# Altium PCB ECG.PcbDoc
Units mil, origin at the board's own origin, x right, y up, seen from the top; angles counter-clockwise.
Board outline 3300 x 2120 mil, 2 copper layers (Top Layer, Bottom Layer), stack 60.4 mil thick; 64 components, 52 nets, 215 pads, 92 vias.
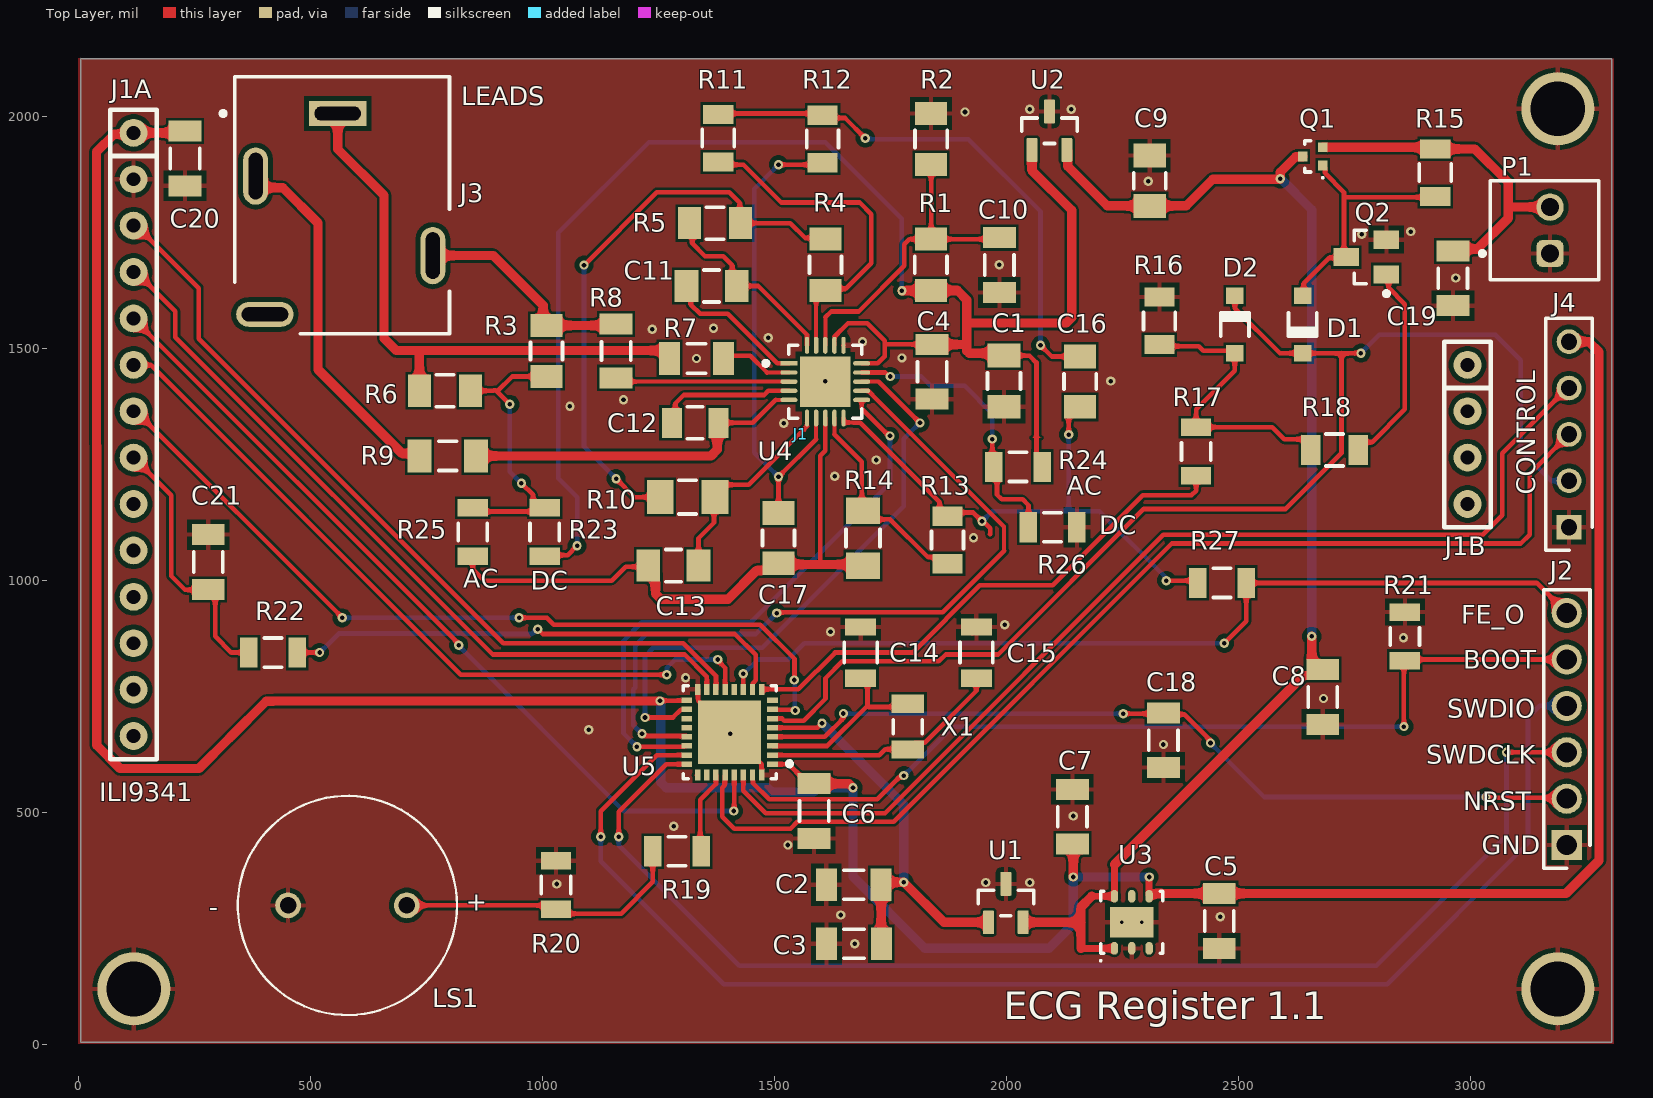
[diagram p0: Top Layer view]
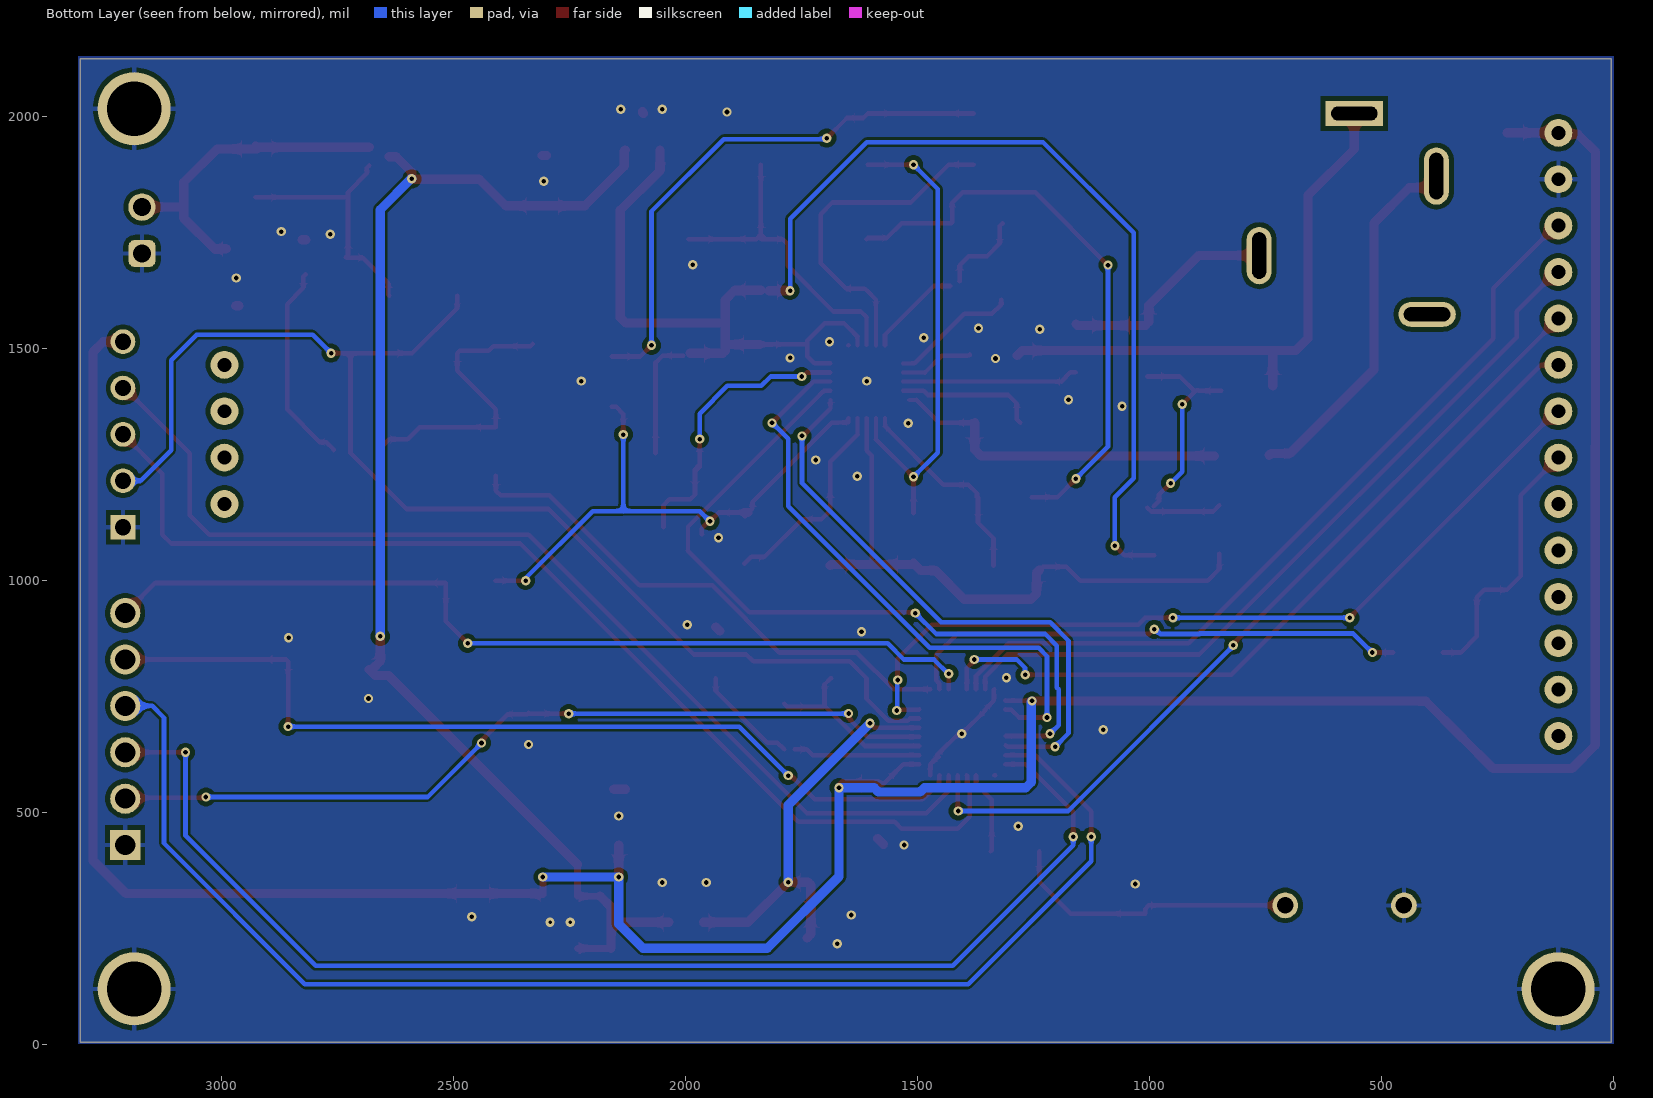
[diagram p1: Bottom Layer view, seen from below]
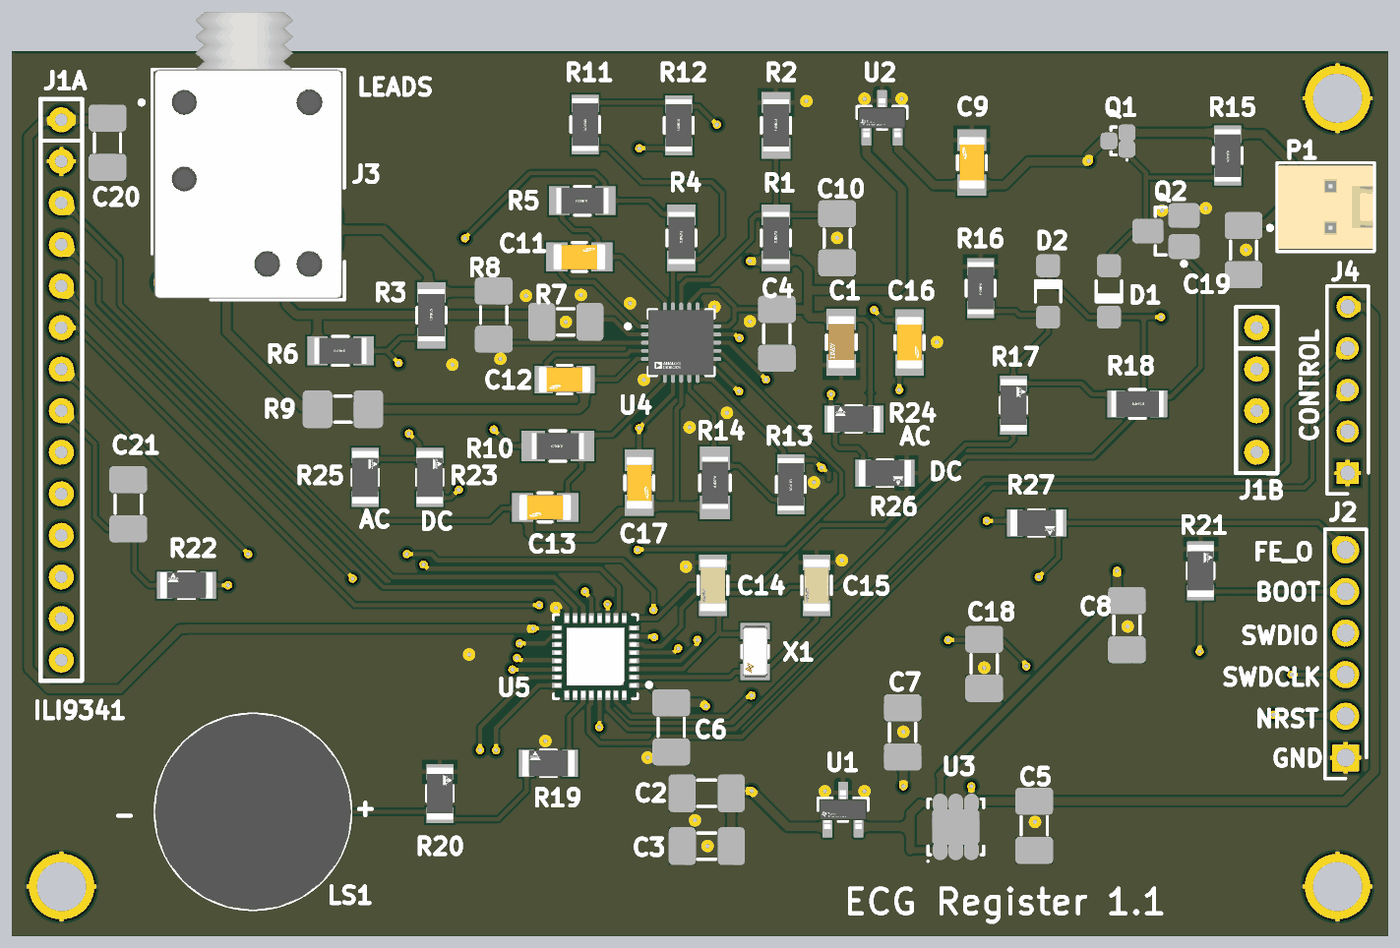
[diagram p2: 3D render of the assembled board from above, using the file's embedded part models]

## Layer stack, top to bottom
Top Solder: solder mask 0.5, Solder Resist, Dk 3.3
Top Layer: signal copper 0.7
Dielectric1: core 59, FR-4, Dk 4.3
Bottom Layer: signal copper 0.7
Bottom Solder: solder mask 0.5, Solder Resist, Dk 3.3

## Board outline
5,5 5,2125 3305,2125 3305,5

## Design rules (kind name [scope] priority, off if disabled: settings)
Clearance [All] p1: gap=5 ignorepadtopadclearanceinfootprint=TRUE except(10: Arc-THPad Track-THPad SMDPad-THPad THPad-THPad THPad-Via THPad-Fill THPad-Poly THPad-Region THPad-Text THPad-Hole Via-Via Via-Fill Via-Poly Via-Region Via-Text Via-Hole Fill-Text Fill-Hole Poly-Text Poly-Hole Region-Text Region-Hole Text-Text Text-Hole)
ComponentClearance [All] p1: gap=10 collisioncheckmode=3 verticalgap=10 showdistances=FALSE donotcheckwithout3dbody=TRUE
DiffPairsRouting [All] p1: maxlimit=10 minlimit=10 mostfreqgap=10 toplayer_minwidth=10 toplayer_maxwidth=10 toplayer_prefwidth=10 bottomlayer_minwidth=10 bottomlayer_maxwidth=10 bottomlayer_prefwidth=10 maxuncoupledlength=500
HoleSize [All] p1: absolutevalues=TRUE maxlimit=300 minlimit=10 maxpercent=80.000 minpercent=20.000
MinimumAnnularRing [All] p1: minimumring=5
MinimumSolderMaskSliver [All] p1: minsoldermaskwidth=5
PasteMaskExpansion [All] p1: expansion=10
PlaneClearance [All] p1: clearance=15
PlaneConnect [All] p1: pad.planeconnectstyle=Relief pad.reliefexpansion=20 pad.reliefentries=4 pad.reliefconductorwidth=10 pad.reliefairgap=10 via.planeconnectstyle=Direct via.reliefexpansion=20 via.reliefentries=4 via.reliefconductorwidth=10 via.reliefairgap=10
PolygonConnect [All] p1: thpad.connectstyle=Relief thpad.reliefconductorwidth=10 thpad.reliefentries=4 thpad.polygonreliefangle="90 Angle" thpad.airgapwidth=10 smdpad.connectstyle=Relief smdpad.reliefconductorwidth=10 smdpad.reliefentries=4 smdpad.polygonreliefangle="90 Angle" smdpad.airgapwidth=10 via.connectstyle=Direct via.reliefconductorwidth=10 via.reliefentries=4 via.polygonreliefangle="90 Angle" via.airgapwidth=10
RoomDefinition ECG [InComponentClass('ECG')] p1: confinementstyle=ConfineOut formatcopy=TRUE lockcomponents=FALSE outline -877,746.05 -131,746.05 -131,1422.05 -877,1422.05
RoutingVias RoutingVias_GND [(InNet('GND'))] p1: holewidth=4 width=8 viastyle="Through Hole" minholewidth=4 minwidth=8 maxholewidth=10 maxwidth=20
RoutingVias RoutingVias_P1 [(InComponent('P1'))] p2: holewidth=28 width=50 viastyle="Through Hole" minholewidth=5 minwidth=10 maxholewidth=28 maxwidth=50
RoutingVias [All] p3: holewidth=10 width=20 viastyle="Through Hole" minholewidth=5 minwidth=10 maxholewidth=10 maxwidth=20
SMDNeckDown [All] p1: percent=150.000
SilkToSolderMaskClearance SilkscreenOverComponentPads [IsPad] p1: minsilkscreentomaskgap=5 clearancetoexposedcopper=TRUE
SolderMaskExpansion [All] p1: expansion=5 istentingtop=FALSE
SupplyNets "Schematic Supply Nets_5" [InNet('GND')] p1: voltage=0.000
SupplyNets "Schematic Supply Nets_4" [InNet('V5V')] p2: voltage=0.000
SupplyNets "Schematic Supply Nets_3" [InNet('VCC')] p3: voltage=0.000
SupplyNets "Schematic Supply Nets_2" [InNet('VDDA')] p4: voltage=0.000
SupplyNets "Schematic Supply Nets_1" [InNet('VAD')] p5: voltage=0.000
SupplyNets "Schematic Supply Nets" [InNet('VBAT')] p6: voltage=0.000
Width [All] p1: maxlimit=20 minlimit=9 preferedwidth=20 toplayer_prefwidth=10 bottomlayer_minwidth=10 minimp=50.000000 maximp=50.000000 favimp=50.000000 checkconnectedcopper=TRUE
22 further rules are at their usual default settings.

## Components (designator, comment, footprint, x,y, rotation, side; value= is the part's Value field where it differs from the comment)
C1 "10u" FP-1206-L_3_2_0_2-W_1_6_0-IPC_B 1995,1430 r270 top
C2 "4.7u" CAPC1206(3216)190_N 1671.15,344.57 r0 top value=4.7uF
C3 "100n" CAPC1206(3216)100_N 1671.53,217.37 r0 top value=100nF
C4 "100n" CAPC1206(3216)100_N 1840,1450 r90 top value=100nF
C5 "4.7u" CAPC1206(3216)190_N 2459.06,266.58 r90 top value=4.7uF
C6 "100n" CAPC1206(3216)100_N 1585.86,503.23 r90 top value=100nF
C7 "100n" CAPC1206(3216)100_N 2142.48,491.13 r270 top value=100nF
C8 "100n" CAPC1206(3216)100_N 2681.97,749.31 r90 top value=100nF
C9 "1u" FP-CL31-IPC_B 2309.06,1861.89 r90 top
C10 "100n" CAPC1206(3216)100_N 1985,1680 r90 top value=100nF
C11 "220n" FP-CL31-IPC_B 1365,1635 r0 top
C12 "1n" FP-CL31-IPC_C 1329.46,1339.93 r180 top
C13 "220n" FP-CL31-IPC_B 1282.52,1032.42 r180 top
C14 "4.3p" FP-C1206C-EB-MFG 1686.22,845 r90 top value="4.3 pF"
C15 "4.3p" FP-C1206C-EB-MFG 1935.5,845.01 r90 top value="4.3 pF"
C16 "10n" FP-CL31-IPC_B 2159.06,1428.86 r270 top
C17 "22n" FP-CL31-IPC_B 1509.06,1091.52 r270 top
C18 "100n" CAPC1206(3216)100_N 2338.71,656.08 r270 top value=100nF
C19 "100n" CAPC1206(3216)100_N 2962.58,1651.53 r90 top value=100nF
C20 "100n" CAPC1206(3216)100_N 230,1910 r270 top value=100nF
C21 "100n" CAPC1206(3216)100_N 280,1040 r270 top value=100nF
D1 "1N4148" DIOD-SOD123-2_V 2638.66,1552.18 r270 top
D2 "1N4148" DIOD-SOD123-2_V 2492.43,1552.18 r90 top
J1 "ILI9341_Shield" ILI9341_Shield-Footprint-1 118.54,664.73 r0 top
J2 "90147-1106" RHDR6W64P0X254_1X6_1509X244X870P 3207.98,430 r90 top
J3 "35RAPC3BH3" FP-35RAPC3BH3-MFG 568.56,1879.28 r270 top
J4 "90147-1105" RHDR5W70P0X254_1X5_1255X244X870P 3212.8,1115.12 r90 top
LS1 "CMT-1285C-015" CUI_CMT-1285C-015 580,300 r180 top
P1 "61900211121" 61900211121 3160,1755 r270 top
Q1 "NTE4151PT1G" ONSC-SC-89-3-463C-02_V 2660.31,1914.24 r180 top
Q2 "BSS123" FAIR-SOT23-3_V 2775.81,1697.32 r90 top
R1 "10M" FP-KTR18-IPC_B 1837.55,1680.72 r270 top
R2 "10M" FP-KTR18-IPC_B 1837.98,1951.61 r270 top
R3 "10M" FP-KTR18-IPC_B 1009.05,1494.9 r270 top
R4 "10M" FP-KTR18-IPC_B 1610.31,1680.72 r270 top
R5 "10M" FP-KTR18-IPC_B 1372.25,1770.45 r0 top
R6 "10M" FP-KTR18-IPC_B 790.31,1409.17 r0 top
R7 "180k" RESC3216X70X40NL20T20 1332.42,1478.75 r0 top
R8 "180k" RESC3216X70X40NL20T20 1159.06,1495.23 r270 top
R9 "360k" RESC3216X60X45ML10T20 796.21,1268.79 r0 top
R10 "1.5M" FP-KTR18-IPC_A 1313.14,1180 r0 top
R11 "1M" FP-KTR18-IPC_C 1379.07,1953.49 r90 top
R12 "1M" FP-KTR18-IPC_C 1604.07,1951.61 r270 top
R13 "1M" FP-KTR18-IPC_C 1873.41,1087.59 r90 top
R14 "100k" FP-KTR18-IPC_A 1691.22,1091.52 r270 top
R15 "1M" FP-KTR18-IPC_C 2924.47,1879.12 r90 top
R16 "1M" FP-KTR18-IPC_C 2330,1560 r90 top
R17 "10k" FP-CRCW1206-e3-IPC_C 2409.06,1278.54 r90 top
R18 "1M" FP-KTR18-IPC_C 2707.24,1281.5 r180 top
R19 "10k" FP-CRCW1206-e3-IPC_C 1290.34,416.68 r180 top
R20 "10k" FP-CRCW1206-e3-IPC_C 1029.45,343.95 r90 top
R21 "10k" FP-CRCW1206-e3-IPC_C 2859.06,880 r90 top
R22 "10k" FP-CRCW1206-e3-IPC_C 420,845 r180 top
R23 "10k" FP-CRCW1206-e3-IPC_C 1005,1105 r90 top
R24 "10k" FP-CRCW1206-e3-IPC_C 2025,1245 r180 top
R25 "10k" FP-CRCW1206-e3-IPC_C 850,1105 r90 top
R26 "10k" FP-CRCW1206-e3-IPC_C 2100,1115 r0 top
R27 "10k" FP-CRCW1206-e3-IPC_C 2465,995 r0 top
U1 "TLV76033DBZT" FP-DBZ0003A-MFG 1999.06,304.96 r90 top
U2 "TLV76033DBZT" FP-DBZ0003A-MFG 2092.98,1969.65 r90 top
U3 "LD39050PU33R" DFN6D_L 2270.44,263.63 r90 top
U4 "AD8232ACPZ-WP" FP-CP-20-8-IPC_A 1609.9,1428.86 r0 top
U5 "STM32L432KCU6" FP-UFQFPN32-A0B8-MFG 1403.79,673.23 r180 top
X1 "32.768K" FP-NX3215SA-MFG 1787.67,685.43 r270 top

## Footprints (in the part's own frame and the unit in brackets; to place one, negate y for a bottom-side part, rotate by r counter-clockwise, add the part's x,y. Pads: shape width x height; smd on the part's side, far side on the other; paste and mask are expansions set on the pad)
61900211121 [mm] "2.54mm Male Locking Header, 2p"
  rrect50% 1.5x1.5 hole 1: 1(1.27,0.3)
  round 1.5 hole 1: 2(-1.27,0.3)
  silkscreen extent -2.71,-3.52 2.71,2.98, body extent -2.54,-2.9 2.54,2.9, height 11.53
CAPC1206(3216)100_N [mm] "Chip Capacitor, Body 3.2x1.6mm, Height 1mm, IPC Medium Density"
  rect 1.15x1.8 smd: 1(-1.5,0) 2(1.5,0)
  silkscreen extent -0.55,-0.8 0.55,0.8, body extent -1.7,-0.9 1.7,0.9, height 1
CAPC1206(3216)190_N [mm] "Chip Capacitor, Body 3.2x1.6mm, Height 1.9mm, IPC Medium Density"
  rect 1.15x1.8 smd: 1(-1.5,0) 2(1.5,0)
  silkscreen extent -0.55,-0.8 0.55,0.8, body extent -1.7,-0.9 1.7,0.9, height 1.9
CUI_CMT-1285C-015 [mm]
  round 1.408 hole 0.9: N(3.25,0) P(-3.25,0)
  silkscreen extent -6,-6 6,6, body extent -6,-6 6,6, height 8.5
DFN6D_L [mm] "SON, 6-Leads, Body 3x3mm, Pitch 0.95mm, Thermal Pad 2.4x1.65mm, IPC High Density"
  oval 0.7x0.4 smd: 1(-1.425,0.95) 2(-1.425,0) 3(-1.425,-0.95) 4(1.425,-0.95) 5(1.425,0) 6(1.425,0.95)
  rect 1.65x2.4 smd: 7(0,0)
  silkscreen extent -2.15,-1.7 1.7,1.75, body extent -1.55,-1.55 1.55,1.55, height 0.95
DIOD-SOD123-2_V [mm] "SOD123, 2-Leads, Body 2.7x1.55mm, Height 1.45mm"
  rect 0.9x0.95 smd: 1(-1.575,0) 2(1.575,0)
  silkscreen extent -0.64,-0.82 0.64,0.77, body extent -1.35,-0.77 1.35,0.77, height 1.45
FAIR-SOT23-3_V [mm] "SOT23, 3-Leads, Body 2.92x1.3mm, Pitch 0.95mm"
  rect 1x1.4 smd: 1(-0.95,-1.1) 2(0.95,-1.1) 3(0,1.1)
  silkscreen extent -2.12,-1.23 1.46,0.65, body extent -1.46,-0.65 1.46,0.65, height 1.2
FP-35RAPC3BH3-MFG [mil]
  rect 53.62x123.62 hole 100 slot 30 at 0 deg paste-99999 mask+0: 1(-127.5,-9.5)
  rrect100% 123.62x53.62 hole 100 slot 30 at 90 deg paste-99999 mask+0: 2(178.77,195.5) 5(7.37,-186.41)
  rrect100% 53.62x123.62 hole 100 slot 30 at 0 deg paste-99999 mask+0: 4(305.5,-166.5)
  silkscreen extent -207,-261 347,232, body extent -351,-235 351,235, height 10
FP-1206-L_3_2_0_2-W_1_6_0-IPC_B [mil]
  rect 51.36x71.11 smd paste+0 mask+0: 1(-55.15,0) 2(55.15,0)
  silkscreen extent -18,-36 18,36, body extent -91,-45 91,45, height 10
FP-C1206C-EB-MFG [mm]
  rect 0.95x1.7 smd paste+0 mask+0: 1(-1.4,0) 2(1.4,0)
  silkscreen extent -0.55,-0.9 0.55,0.9, body extent -2,-1 2,1, height 0.25
FP-CL31-IPC_B [mil]
  rect 51.4x69.22 smd paste+0 mask+0: 1(-54.19,0) 2(54.19,0)
  silkscreen extent -17,-35 17,35, body extent -90,-44 90,44, height 10
FP-CL31-IPC_C [mil]
  rect 43.52x65.28 smd paste+0 mask+0: 1(-50.25,0) 2(50.25,0)
  silkscreen extent -17,-34 17,34, body extent -76,-38 76,38, height 10
FP-CP-20-8-IPC_A [mm]
  rect 0.931x0.239 smd paste+0 mask+0: 1(-1.991,1)
  rrect100% 0.931x0.239 smd paste+0 mask+0: 2(-1.991,0.5) 3(-1.991,0) 4(-1.991,-0.5) 5(-1.991,-1) 11(1.991,-1) 12(1.991,-0.5) 13(1.991,0) 14(1.991,0.5) 15(1.991,1)
  rrect100% 0.239x0.931 smd paste+0 mask+0: 6(-1,-1.991) 7(-0.5,-1.991) 8(0,-1.991) 9(0.5,-1.991) 10(1,-1.991) 16(1,1.991) 17(0.5,1.991) 18(0,1.991) 19(-0.5,1.991) 20(-1,1.991)
  rect 2.75x2.75 smd paste-1000 mask+0: 21(0,0)
  silkscreen extent -3.38,-2 2,2, body extent -2.96,-2.96 2.96,2.96, height 0.25
FP-CRCW1206-e3-IPC_C [mil]
  rect 37.64x65.28 smd paste+0 mask+0: 1(-52.21,0) 2(52.21,0)
  silkscreen extent -19,-31 19,31, body extent -75,-38 75,38, height 10
FP-DBZ0003A-MFG [mm]
  rrect17% 1.3x0.6 smd paste+0 mask+0: 1(-1.05,0.95) 2(-1.05,-0.95) 3(1.05,0)
  silkscreen extent -0.7,-1.52 0.7,1.52, body extent -1.8,-1.62 1.8,1.62, height 0.25
FP-KTR18-IPC_A [mil]
  rect 57.31x73.16 smd paste+0 mask+0: 1(-59.1,0) 2(59.1,0)
  silkscreen extent -19,-37 19,37, body extent -107,-56 107,56, height 10
FP-KTR18-IPC_B [mil]
  rect 49.44x69.22 smd paste+0 mask+0: 1(-55.17,0) 2(55.17,0)
  silkscreen extent -19,-35 19,35, body extent -90,-44 90,44, height 10
FP-KTR18-IPC_C [mil]
  rect 41.56x65.28 smd paste+0 mask+0: 1(-51.23,0) 2(51.23,0)
  silkscreen extent -19,-34 19,34, body extent -76,-38 76,38, height 10
FP-NX3215SA-MFG [mm]
  rect 1x1.8 smd paste+0 mask+0: 1(-1.25,0) 2(1.25,0)
  silkscreen extent -0.38,-0.8 0.38,0.8, body extent -1.85,-1 1.85,1, height 0.25
FP-UFQFPN32-A0B8-MFG [mm]
  rect 0.6x0.3 smd paste+0 mask+0: 1(-2.35,1.75) 2(-2.35,1.25) 3(-2.35,0.75) 4(-2.35,0.25) 5(-2.35,-0.25) 6(-2.35,-0.75) 7(-2.35,-1.25) 8(-2.35,-1.75) 17(2.35,-1.75) 18(2.35,-1.25) 19(2.35,-0.75) 20(2.35,-0.25) 21(2.35,0.25) 22(2.35,0.75) 23(2.35,1.25) 24(2.35,1.75)
  rect 0.3x0.6 smd paste+0 mask+0: 9(-1.75,-2.35) 10(-1.25,-2.35) 11(-0.75,-2.35) 12(-0.25,-2.35) 13(0.25,-2.35) 14(0.75,-2.35) 15(1.25,-2.35) 16(1.75,-2.35) 25(1.75,2.35) 26(1.25,2.35) 27(0.75,2.35) 28(0.25,2.35) 29(-0.25,2.35) 30(-0.75,2.35) 31(-1.25,2.35) 32(-1.75,2.35)
  rect 3.45x3.45 smd paste+0 mask+0: 33(0,0)
  silkscreen extent -3.4,-2.55 2.55,2.55, body extent -2.75,-2.75 2.75,2.75, height 0.25
ILI9341_Shield-Footprint-1 [mil]
  round 60 hole 30: 1(0.53,1300.34) 2(0.53,1200.34) 3(0.53,1100.34) 4(0.53,1000.34) 5(0.53,900.34) 6(0.53,800.34) 7(0.53,700.34) 8(0.53,600.34) 9(0.53,500.34) 10(0.53,400.34) 11(0.53,300.34) 12(0.53,200.34) 13(0.53,100.34) 14(0.53,0.34) 15(2875.53,800.34) 16(2875.53,700.34) 17(2875.53,600.34) 18(2875.53,500.34)
  silkscreen extent -50,-50 2926,1350, body extent -45,-45 2920,1345, height 300
ONSC-SC-89-3-463C-02_V [mm] "SOT23, 3-Leads, Body 1.6x0.85mm, Pitch 0.5mm"
  rect 0.53x0.53 smd: 1(-0.55,0.5) 2(-0.55,-0.5) 3(0.55,0)
  silkscreen extent -0.6,-0.85 0.43,1.21, body extent -0.42,-0.8 0.43,0.8, height 0.8
RESC3216X60X45ML10T20 [mm] "Chip Resistor, 2-Leads, Body 3.20x1.60mm, IPC Low Density"
  rect 1.3x1.8 smd: 1(-1.55,0) 2(1.55,0)
  silkscreen extent -0.5,-0.8 0.5,0.8, body extent -1.65,-0.85 1.65,0.85, height 0.6
RESC3216X70X40NL20T20 [mm] "Chip Resistor, 2-Leads, Body 3.20x1.60mm, IPC Medium Density"
  rect 1.15x1.8 smd: 1(-1.475,0) 2(1.475,0)
  silkscreen extent -0.5,-0.8 0.5,0.8, body extent -1.7,-0.9 1.7,0.9, height 0.7
RHDR5W70P0X254_1X5_1255X244X870P [mm]
  rect 1.35x1.35 / inner round 1.35 / far side rect 1.35x1.35 hole 0.9: 1(0,0)
  round 1.35 hole 0.9: 2(2.54,0) 3(5.08,0) 4(7.62,0) 5(10.16,0)
  silkscreen extent -1.27,-1.27 11.43,1.27
RHDR6W64P0X254_1X6_1509X244X870P [mm]
  rect 1.65x1.65 / inner round 1.65 / far side rect 1.65x1.65 hole 1.1: 1(0,0)
  round 1.65 hole 1.1: 2(2.54,0) 3(5.08,0) 4(7.62,0) 5(10.16,0) 6(12.7,0)
  silkscreen extent -1.27,-1.27 13.97,1.27

## Part data
C1: library part CMP-04427-001599-1, "General Purpose Ceramic Capacitor, 1206, 10uF, 20%, X5R, 15%, 50V"
C2 C5: library part CMP-1037-04896-1, "CAP 4.7uF 6.3V ±10% 1206 (3216 Metric) Thickness 1.9mm SMD", Case-EIA=1206, Case-Metric=3216, Manufacturer Part Number=C1206C475K9PACTU, Rated Voltage="6.3 V", Tolerance=Â±10%, Max Thickness="1.9 mm", Technology=SMT
C3 C4 C6 C7 C8 C10 C19: library part CMP-1037-04190-1, "CAP 100nF 25V ±5% 1206 (3216 Metric) Thickness 1mm SMD", Case-EIA=1206, Case-Metric=3216, Rated Voltage="25 V", Tolerance=Â±5%, Max Thickness="1 mm", Technology=SMT
C9: library part CMP-13271-003701-1, "Cap Ceramic 1uF 16V X7R ±10% SMD 1206 +125°C Embossed T/R", Capacitance=1uF, Case Code (Imperial)=1206, Case Code (Metric)=3216, Max Operating Temperature=125°C, Min Operating Temperature=-55°C, Package Quantity=1, Tolerance=10%, Voltage Rating=16V, Case/Package=1206, Length=0.126inch, Mount="Surface Mount", Packaging="Tape and Reel", Thickness=0.055inch, Width=0.063inch
C11 C13: library part CMP-13271-000776-1, "Cap Ceramic 220nF 50V X7R ±10% SMD 1206 +125°C Embossed T/R", Capacitance=220nF, Case Code (Imperial)=1206, Case Code (Metric)=3216, Dielectric=X7R, Max Operating Temperature=125°C, Min Operating Temperature=-55°C, Package Quantity=1, Tolerance=10%, Voltage Rating=50V, Case/Package=1206, Depth=1.6mm, Height=1.25mm, Length=0.126inch, Mount="Surface Mount", Packaging="Tape and Reel", Radiation Hardening=No, Thickness=0.055inch, Width=0.063inch
C12: library part CMP-13271-001948-1, "Cap Ceramic 1nF 50V X7R ±10% SMD 1206 +125°C Embossed T/R", Capacitance=1nF, Case Code (Imperial)=1206, Case Code (Metric)=3216, Dielectric=X7R, Max Operating Temperature=125°C, Min Operating Temperature=-55°C, Package Quantity=4000, Tolerance=10%, Voltage=63V, Voltage Rating=50V, Case/Package=1206, Depth=1.6mm, Height=0.85mm, Lead Free="Lead Free", Length=3.2mm, Material=Ceramic, Mount="Surface Mount", Packaging="Tape and Reel", Radiation Hardening=No, Thickness=0.037inch, Voltage Rating (DC)=50V, Width=0.063inch
C14 C15: library part CMP-1037-00358-2, "CAP CER 4.3PF 50V NP0 1206", Capacitance="4.3 pF", Manufacturer=KEMET, Manufacturer Part Number=C1206C439C5GACTU, Package=C1206C-EB, Temperature="-55°C to +150°C", Temperature Characteristic=C0G, Temperature Coefficient=15%, Temperature Range High=+150°C, Temperature Range Low=-55°C, Tolerance="0.25 pF", Voltage Rating="50 V", Automotive=Yes, Automotive Grade="Grade 0", Category=Cap, ComponentLink2Description=Datasheet, ComponentLink2URL=https://content.kemet.com/datasheets/KEM_C1007_X8R_ULTRA_150C_SMD.pdf, Device Class L1="Passive Components", Device Class L2=Capacitors, Device Class L3="Ceramic Capacitors", Digikey Description="CAP CER 4.3PF 50V NP0 1206", Height=0.88mm, Ipc Land Pattern Name=CAPC320160X78, Lead Free=Yes, Material=Ceramic, Mouser Description="Multilayer Ceramic Capacitors MLCC - SMD/SMT 50volts 4.3pF C0G 0.25%", Octopart=https://octopart.com/c1206c439c5gactu-kemet-17002280, RoHS=TRUE
C16: library part CMP-13271-002682-1, "Cap Ceramic 10nF 100V X7R ±5% SMD 1206 +125°C Embossed T/R", Capacitance=10nF, Case Code (Imperial)=1206, Case Code (Metric)=3216, Max Operating Temperature=125°C, Min Operating Temperature=-55°C, Package Quantity=1, Tolerance=5%, Voltage Rating=100V, Case/Package=1206, Length=0.126inch, Mount="Surface Mount", Packaging="Tape and Reel", Thickness=0.037inch, Width=0.063inch
C17: library part CMP-13271-001653-1, "Cap Ceramic 22nF 630V X7R ±10% SMD 1206 +125°C Embossed T/R", Capacitance=22nF, Case Code (Imperial)=1206, Case Code (Metric)=3216, Max Operating Temperature=125°C, Min Operating Temperature=-55°C, Package Quantity=1, Tolerance=10%, Voltage Rating=630V, Case/Package=1206, Lead Free="Lead Free", Length=0.126inch, Mount="Surface Mount", Packaging="Tape and Reel", Thickness=0.057inch, Width=0.063inch
C18 C20 C21: library part CMP-1037-04190-1, "CAP 100nF 25V ±5% 1206 (3216 Metric) Thickness 1mm SMD", Case-EIA=1206, Case-Metric=3216, Manufacturer Part Number=VJ1206Y104JXXCW1BC, Rated Voltage="25 V", Tolerance=Â±5%, Max Thickness="1 mm", Technology=SMT
D1 D2: library part CMP-2000-04932-2, "Fast Switching Diode, 100 V, 0.15 A, -65 to 150 degC, 2-Pin?SOD123, RoHS, Tape and Reel", If - Forward Current=0.15A, Ir - Reverse Current=1uA, Manufacturer=DiodesIncorporated, Max Surge Current=2A, Maximum Operating Temperature=+150C, Minimum Operating Temperature=-65C, Operating Temperature Range=-65Cto+150C, Package / Case=SOD-123, Package Reference=SOD123-2, Peak Reverse Voltage=100V, Vf - Forward Voltage=1.25V, Brand=DiodesIncorporated, Configuration=Single, Datasheet URL=http://www.farnell.com/datasheets/1915529.pdf, Datasheet Version="Rev. 24-2, 10/2013", Factory Pack Quantity=3000, Height=1.25mm, Length=2.85mm, Manufacturer URL=http://www.diodes.com/, Mounting Style=SMD/SMT, Package URL=http://www.diodes.com/datasheets/ds18004.pdf, Packaging=Reel, Product=SwitchingDiodes, Product Category=Diodes-GeneralPurpose,Power,Switching, Recovery Time=4ns, RoHS=True, Series=1N4148, Type=SwitchingDiode, Unit Weight=0.000353oz, Width=1.7mm
J1: library part CMP-00000-11, "ILI9341 LCD Shield"
J2: "Headers & Wire Housings VERT SINGLE PCB 6P straight tail", Manufacturer_Name=Molex, Mouser Part Number=538-90147-1106, Datasheet Link=https://www.molex.com/pdm_docs/sd/901471215_sd.pdf, Geometry.Height=8.7mm, Manufacturer_Part_Number=90147-1106, Mouser Price/Stock=https://www.mouser.co.uk/ProductDetail/Molex/90147-1106?qs=zXrbR4Jv0OdcnWPUJ7rDTg%3D%3D
J3: library part CMP-47983-000003-1, "CONN JACK STEREO 3.5MM R/A", Body Color=Black, Package Quantity=1, Voltage Rating=500V, Body Material=Brass, Color=Black, Contact Material="Copper Alloy", Contact Plating=Silver, Gender=Female, Housing Material=PBT, Lead Free="Lead Free", Mount="Through Hole", Number of Ports=1, Number of Positions=3, Number of Terminals/Pins=3, Orientation="Right Angle", Packaging=Bulk, RoHS Compliant=Yes, Series=35, Shielding=Unshielded, Termination=Solder
J4: "Headers & Wire Housings C-Grid PCB Conn SR V Conn SR Vt Tn-A 5Ckt", Manufacturer_Name=Molex, Mouser Part Number=538-90147-1105, Geometry.Height=8.7mm, Manufacturer_Part_Number=90147-1105, Mouser Price/Stock=https://www.mouser.co.uk/ProductDetail/Molex/90147-1105?qs=QESXi79X%252BKok%2FrcE1h3Lyg%3D%3D
LS1: "12 mm, 1.5 Vo-p, 91 dB, Through Hole, Magnetic Audio Transducer Buzzer", Package="TO-220 CUI Inc.", Availability=Warning, CUI_purchase_URL=https://www.cuidevices.com/product/audio/buzzers/audio-transducers/cmt-1285c-015?utm_source=snapeda.com&utm_medium=referral&utm_campaign=snapedaBOM, MF="CUI Devices", MP=CMT-1285C-015, Price=None, Purchase-URL=https://pricing.snapeda.com/search/part/CMT-1285C-015/?ref=eda, SnapEDA_Link=https://www.snapeda.com/parts/CMT-1285C-015/CUI%20Devices/view-part/2772237/?ref=snap
P1: library part CMP-1502-00584-3, Color=Beige, Contact Resistance=20mΩ, Current Rating=3A, Flammability Rating="UL94 V-0", Insulation Resistance=1GΩ, Max Operating Temperature=105°C, Min Operating Temperature=-40°C, Operating Supply Voltage=250V, Connector Type="Male Pin", Contact Gender=Male, Contact Material=Copper, Contact Mating Length=7.493mm, Contact Plating=Tin, Fastening Type=Friction, Gender=Male, Height=11.75mm, Housing Material=Nylon, Lead Pitch=2.54mm, Length=5.08mm, Mount="Through Hole", NexarPartId=18818218, Number of Contacts=2, Number of Pins=2, Number of Positions=2, Number of Rows=1, Orientation=Vertical, Packaging=Bulk, Pitch=2.54mm, REACH SVHC=Unknown, RoHS=Compliant, Termination="Through Hole", Voltage Rating=250V, Width=5.12mm
Q1: library part CMP-1058-00652-1, "Small Signal MOSFET, -20 V, -760 mA, Single P-Channel, Gate Zener, 3-Pin SC-89, Pb-Free, Tape and Reel", Manufacturer="On Semiconductor", Package Type=SC-89-3, Channel Polarity="P Channel", Ciss Typ (pF)=156, ComponentLink1Description="Manufacturer URL", ComponentLink1URL=http://www.onsemi.com/, ComponentLink2Description=Datasheet, ComponentLink2URL=http://www.onsemi.com/pub_link/Collateral/NTA4151P-D.PDF, ComponentLink3Description="Package Specification", ComponentLink3URL=http://www.onsemi.com/pub_link/Collateral/463C-02.PDF, Configuration=Single, Coss Typ (pF)=28, Crss Typ (pF)=18, DatasheetVersion="Rev. 7", ID Max (A)=0.76, Mounting Technology="Surface Mount", PackageDescription="3-Pin Small Outline Transistor, Body 1.6 x 0.85 mm, Pitch 0.5 mm", PackageReference=SC-89-3-463C-02, PackageVersion="Rev. C, 07/2003", Packing="Tape and Reel", PartNumber=NTE4151PT1G, RoHS=Pb-Free, V(BR)DSS Min (V)=20, VGS Max (V)=6, VGS(th) Max (V)=1.2
Q2: library part CMP-2000-04934-1, "N-Channel Logic Level Enhancement Mode Field Effect Transistor, 1.7 V, -55 to 150 degC, 3-Pin SOT-23, RoHS, Tape and Reel", Manufacturer=Fairchild, Maximum Continuous Drain Current=0.17A, Maximum Drain Source Voltage=100V, Maximum Gate Source Voltage=±20V, Operating Temperature=-55to150degC, Package=3SOT-23, Package Description="3-Pin Small Outline Transistor, Body 2.92 x 1.325 mm, Pitch 0.95 mm", Package Reference=SOT23-3, Package Version="Rev. 12, 03/2016", Category=MOSFET, Channel Mode=Enhancement, Channel Type=N, Datasheet URL=https://www.fairchildsemi.com/datasheets/BS/BSS123.pdf, Datasheet Version=Jun-03, Manufacturer URL=https://www.fairchildsemi.com/, Mounting=SurfaceMount, Package URL=http://www.fairchildsemi.com/dwg/MA/MA03D.pdf, Packaging=Tape&Reel, Rad Hard=No, RDS-on=6000@10VmOhm, Typical Fall Time=2.4ns, Typical Rise Time=9ns, Typical Turn-Off Delay Time=17ns, Typical Turn-On Delay Time=1.7ns
R1 R2 R3 R4 R5 R6: library part CMP-08839-030218-1, "Res Thick Film 1206 10MΩ 1% 0.1W ±100ppm/°C Automotive Paper T/R", Case Code (Imperial)=1206, Case Code (Metric)=3216, Max Operating Temperature=155°C, Max Power Dissipation=250mW, Min Operating Temperature=-55°C, Package Quantity=1, Resistance=10MR, Resistor Type="Thick Film", Temperature Coefficient=100ppm/°C, Tolerance=1%, Case/Package=1206, Features="Automotive AEC-Q200", Height=0.026inch, Lead Free="Lead Free", Length=0.126inch, Mount="Surface Mount", Number of Terminations=2, Packaging="Tape and Reel", Power Rating=250mW, RoHS Compliant=Yes, Series=KTR, Width=0.063inch
R7 R8: library part CMP-2003-04559-1, Manufacturer="KOA Speer", Part Number=RK73B2BTTD184J
R9: library part CMP-2003-02118-1, Manufacturer="Vishay Dale", Part Number=CRCW1206360KJNEA
R10: library part CMP-08839-006825-1, "Res Thick Film 1206 1.5MΩ 1% 0.1W ±100ppm/°C Automotive Paper T/R", Case Code (Imperial)=1206, Case Code (Metric)=3216, Max Operating Temperature=155°C, Max Power Dissipation=250mW, Min Operating Temperature=-55°C, Package Quantity=1, Resistance=1.5MR, Resistor Type="Thick Film", Temperature Coefficient=100ppm/°C, Tolerance=1%, Case/Package=1206, Features="Automotive AEC-Q200", Height=0.026inch, Length=0.126inch, Number of Terminations=2, Packaging="Tape and Reel", RoHS Compliant=Yes, Series=KTR18, Width=0.063inch
R11 R12 R13 R15 R16 R18: library part CMP-08839-030004-1, "Res Thick Film 1206 1MΩ 1% 0.1W ±100ppm/°C Automotive Paper T/R", Case Code (Imperial)=1206, Case Code (Metric)=3216, Max Operating Temperature=155°C, Max Power Dissipation=250mW, Min Operating Temperature=-55°C, Package Quantity=1, Resistance=1MR, Resistor Type="Thick Film", Temperature Coefficient=100ppm/°C, Tolerance=1%, Case/Package=1206, Features="Automotive AEC-Q200", Height=0.026inch, Lead Free="Lead Free", Length=0.126inch, Mount="Surface Mount", Number of Terminations=2, Packaging="Tape and Reel", Power Rating=250mW, RoHS Compliant=Yes, Series=KTR18, Width=0.063inch
R14: library part CMP-08839-031298-1, "Res Thick Film 1206 100kΩ 1% 0.1W ±100ppm/°C Automotive Paper T/R", Case Code (Imperial)=1206, Case Code (Metric)=3216, Max Operating Temperature=155°C, Max Power Dissipation=250mW, Min Operating Temperature=-55°C, Package Quantity=1, Resistance=100kR, Resistor Type="Thick Film", Temperature Coefficient=100ppm/°C, Tolerance=1%, Case/Package=1206, Features="Automotive AEC-Q200", Height=0.026inch, Lead Free="Lead Free", Length=0.126inch, Mount="Surface Mount", Number of Terminations=2, Packaging="Tape and Reel", Power Rating=250mW, RoHS Compliant=Yes, Series=KTR, Width=0.063inch
R17 R19 R20 R21 R22 R23 R24 R25 R26 R27: library part CMP-2003-04807-2, "RES Thick Film, 10kΩ, 1%, 0.25W, 100ppm/°C, 1206", Case Code (Imperial)=1206, Case Code (Metric)=3216, Max Operating Temperature=155°C, Max Power Dissipation=250mW, Min Operating Temperature=-55°C, Package Quantity=10, Resistance=10kR, Temperature Coefficient=100ppm/°C, Tolerance=1%, Voltage Rating=200V, Case/Package=1206, Composition="Thick Film", Contact Plating=Tin, Depth=1.6mm, Features="Automotive AEC-Q200", Height=0.55mm, Lead Free="Lead Free", Length=3.2mm, Military Standard=Not, Number of Pins=2, Number of Terminations=2, Packaging="Tape and Reel", Power Rating=250mW, Radiation Hardening=No, Termination=SMD/SMT, Voltage Rating (DC)=200V, Weight=0.000353oz, Width=0.063inch, Working Voltage=200V
U1 U2: library part CMP-04917-000033-1, "IC REG LINEAR 3.3V 100MA SOT23-3", Dropout Voltage=0.9V, Manufacturer="Texas Instruments", Max Junction Temp=+125°C, Max Supply Voltage=30V, Min Supply Voltage=4.2V, Nominal Supply Current=2mA, Output Current=100mA, Output Voltage=3.3V, Package=DBZ0003A, Temperature="-40°C to +125°C", Temperature Range Low=-40°C, Accuracy Percentage=4%, Automotive=No, Category=IC, ComponentLink2Description=Datasheet, ComponentLink2URL=http://www.ti.com/lit/ds/symlink/tlv760.pdf, Device Class L1="Integrated Circuits (ICs)", Device Class L2="Power Management ICs", Device Class L3="Voltage Regulators - Linear", Digikey Description="IC REG LINEAR 3.3V 100MA SOT23-3", Height=1.12mm, Ipc Land Pattern Name=SOT95P237X112-3, Lead Free=Yes, Manufacturer Part Number=TLV76033DBZT, Number Of Outputs=1, Octopart=https://octopart.com/tlv76033dbzt-texas+instruments-84619834, Output Type=Fixed, RoHS=TRUE, Standoff Height=0.01mm, Temperature Range High=+125°C
U3: library part CMP-0244-00288-1, "500 mA Low Quiescent Current Low Noise Voltage Regulator, 3.3V, 6-Pin VDFDPN, Tape and Reel", ComponentLink1Description="Manufacturer URL", ComponentLink1URL=http://www.st.com, ComponentLink2Description=Datasheet, ComponentLink2URL=http://www.st.com/internet/com/TECHNICAL_RESOURCES/TECHNICAL_LITERATURE/DATASHEET/CD00227527.pdf, DatasheetVersion=1/03/2009, Manufacturer Part Number=LD39050PU33R, PackageDescription="6-Pin Plastic, Dual LLP, 3 x 3 mm Body, 0.95 mm Pitch, Exposed Pad", PackageReference=DFN6D, PackageVersion=2008
U4: library part CMP-09085-000022-1, "IC ECG FRONT END 20LFCSP", Case/Package="LFCSP EP", Input Bias Current=200pA, Input Offset Voltage (Vos)=3mV, Max Operating Temperature=85°C, Max Supply Voltage=3.5V, Min Operating Temperature=-40°C, Min Supply Voltage=2V, Operating Supply Current=170uA, Power Supply Rejection Ratio (PSRR)=90dB, Common Mode Rejection Ratio=80dB, Contact Plating=Tin, Gain Bandwidth Product=100kHz, Height=0.75mm, Lead Free="Contains Lead", Length=4.1mm, Mount="Surface Mount", Number of Channels=1, Number of Pins=20, Packaging=Tray, Radiation Hardening=No, REACH SVHC="No SVHC", RoHS Compliant=Yes, Series=-, Slew Rate=0.2V/µs, Width=4.1mm
U5: library part CMP-12105-000033-1, "IC MCU 32BIT 256KB FLASH 32QFPN", Ambient Temperature Range High=+85°C, Ambient Temperature Range Low=-40°C, Frequency=80MHz, Manufacturer=STMicroelectronics, Manufacturer Part Number 1=STM32L432KCU3, Max Junction Temp=+105°C, Max Supply Voltage=3.6V, Min Supply Voltage=1.62V, Package=UFQFPN32-A0B8, Temperature="-40°C to +105°C", Automotive=No, Category=IC, ComponentLink2Description=Datasheet, ComponentLink2URL=https://www.st.com/content/ccc/resource/technical/document/datasheet/24/01/9f/59/f0/83/47/fc/DM00257205.pdf/files/DM00257205.pdf/jcr:content/translations/en.DM00257205.pdf, Core Architecture="ARM Cortex-M4", Data Bus Width=32bits, Device Class L1="Integrated Circuits (ICs)", Device Class L2="Embedded Processors and Controllers", Device Class L3=Microcontrollers, Digikey Description="IC MCU 32BIT 256KB FLASH 32QFPN", Height=0.6mm, Interface=I2C,SPI,UART,USART,CAN,USB,LIN,IrDA,Other, Lead Free=Yes, Manufacturer Part Number=STM32L432KCU6, Memory Size=256KBytes, Memory Type=FLASH, Number Of A/D Converters=1, Number Of Adc Channels=11, Number Of Cores=1, Number Of I2C Channels=2, Number Of I/Os=26, Number Of Pwm Channels=1, Number Of Spi Channels=2, Number Of Timers/Counters=11, Number Of Uart Channels=3, Number Of Usb Channels=1, Octopart=https://octopart.com/stm32l432kcu6-stmicroelectronics-71093510, RAM Size=64KBytes, RoHS=TRUE, Temperature Range High=+105°C, Temperature Range Low=-40°C
X1: library part CMP-200220-000010-1, "CRYSTAL 32.7680KHZ 12.5PF SMD", Case/Package=SMD/SMT, ESR (Equivalent Series Resistance)=70kR, Frequency=32.768kHz, Frequency Tolerance=20ppm, Load Capacitance=12.5pF, Max Operating Temperature=125°C, Min Operating Temperature=-40°C, Package Quantity=1000, Height=0.035inch, Length=0.126inch, Mount="Surface Mount", Number of Pins=2, Packaging="Tape and Reel", Width=0.059inch

## Free pads (board coordinates)
  round 157.48 hole 118.11: 4(119.58,120) 4(3188.63,120) 4(3188.63,2016.99)

## Via types
v1: diameter 20, hole 10, Top Layer to Bottom Layer, 90 vias
v2: diameter 19.68, hole 7.87, Top Layer to Bottom Layer, 2 vias

## Nets (pads, with @x,y where several pads share a name; then routed paths per layer and width w, separated by ;. In a path a pad name is that pad's centre, name@x,y a point inside that pad or via, vN(x,y) a via of type N, cw(c..) or ccw(c..) an arc to the next point about the centre after c; other vN are vias at no path point)
+IN: R7.2 U4.2 | length 155
  Top Layer w9: 1484.29,1448.54 U4.2
  Top Layer w10: R7.2@1387.94,1485.39 R7.2@1387.94,1487.41 ; R7.2@1393.49,1484.62 1448.21,1484.62 1484.29,1448.54
-IN: R8.2 U4.3 | length 380.7
  Top Layer w9: R8.2@1190.84,1428.86 U4.3
  Top Layer w10: R8.2@1159.06,1448.78 1170.92,1448.78 R8.2@1190.84,1428.86
AC/DC: R24.2 R26.1 U4.14 | length 636
  Top Layer w10: U4.14 1738.75,1448.54 1747.29,1440 v1(1750,1440) ; v1(1970,1305) 1970,1245 R24.2@1980,1235 ; R24.2@1973.6,1246.4 1980,1240 1980,1185 1990,1175 2035,1175 2047.79,1162.21 R26.1
  Bottom Layer w10: v1(1750,1440) 1817,1440 1837,1420 1910,1420 1970,1360 v1(1970,1305)
Boot: J2.5 R21.1 U5.31 | length 1992.7
  Top Layer w10: U5.31 1453.91,579.8 1453.91,563.86 1488.93,528.83 1721.93,528.83 1772.9,579.8 v1(1779.25,579.8) ; v1(2856.97,685.43) 2856.97,825.7 R21.1 2861.26,830 J2.5
  Bottom Layer w10: v1(1779.25,579.8) 1884.88,685.43 v1(2856.97,685.43)
Button: D1.2 D2.2 J4.2 U5.6 | length 2756.1
  Top Layer w10: U5.6 1516.49,702.75 1521.18,698.07 1563.06,698.07 1610.31,745.32 1610.31,789.48 1646.85,826.02 1854.71,826.02 1869.5,840.81 1982.44,840.81 2296.12,1154.49 2601.85,1154.49 2722.53,1275.17 2722.53,1490.17 ; D2.2 2492.67,1613.95 2492.67,1587.33 2589.83,1490.17 2722.53,1490.17 ; v1(2764.22,1490.17) 2722.53,1490.17
  Bottom Layer w10: v1(2764.22,1490.17) 2804.05,1530 3054.21,1530 3109.06,1475.16 3109.06,1280.94 3174.88,1215.12 J4.2
Drive: J3.5 R9.1 | length 799.8
  Top Layer w20: J3.5 382.14,1862.45 397.67,1846.92 440.45,1846.92 516.5,1770.87 516.5,1454.9 697.4,1274 738.42,1274 R9.1@742.08,1270.34
FE_OUT: J2.6 R27.2 U5.11 | length 1964.2
  Top Layer w10: v1(1432.91,799.54) 1433.32,799.14 U5.11 ; v1(2470,865) 2517.21,912.21 R27.2 3142.98,995 3205,932.98 J2.6@3205,930
  Bottom Layer w10: v1(1432.91,799.54) 1434.54,799.54 1465,830 1530,830 1565,865 v1(2470,865)
GND: C1.2 C2.1 C3.1 C4.1 C5.1 C6.1 C7.1 C8.1 C9.2 C10.1 C14.2 C15.2 C18.2 C19.1 C20.2 C21.1 J1.2 J2.1 J4.1 LS1.N P1.1 pad.4 Q2.2 R2.1 R16.2 R20.2 R21.2 R26.2 U1.3 U2.3 U3.2 U3.7 U4.16 U4.21 U5.16 U5.32 U5.33 | length 327.3
  Top Layer w10: U5.16 1335.8,764.84 1335.8,741.22 1355,722.02 1355,720 v1(1405,670) ; U5.33@1408.79,673.23 U5.33@1458.51,623.51 ; U5.33@1455,620 1457.02,620 1472.69,604.33 U5.32 ; U4.16 U4.16@1649.56,1506.94
  Top Layer w20: C6.1@1573.75,432.07 C6.1 ; C15.2@1926.8,891.42 C15.2 ; U2.3@2091.17,2006.78 2092.98,2008.59 U2.3 ; C7.1@2129.69,550.18 C7.1 C7.1@2155.28,550.18 ; C9.2@2300.14,1916.07 C9.2 ; Q2.2 Q2.2@2826.99,1734.72 ; C19.1 C19.1@2969.76,1592.47
  other v1: 1673.38,217.6 2460.86,275.53 1643.03,279.49 1031.25,346.05 1955.56,349.45 2050.79,349.45 1529.35,430.21 1283.39,470.33 2144.45,492.66 2338.64,646.75 1099.86,678.46 2683.77,745.9 1308.82,790.71 2855.86,877.1 1621.18,889.82 1996.39,905.12 1929.31,1092.59 1630,1225 1720,1260 1520.16,1339.38 1059.53,1375.83 1175,1390 1610,1430 2225,1430 1332.42,1478.75 1775,1480 1690,1515 1486.75,1523.6 1236.77,1541.68 1368.84,1543.64 2968.55,1652.13 1985.02,1680.86 2766.02,1746.44 2871.67,1752.21 2305.86,1860.97 1910.95,2009.9 2050.84,2015.68 2140.22,2015.68
  other v2: 2248.78,263.63 2292.09,263.63
HPD: C11.1 U4.1 | length 274
  Top Layer w9: U4.1@1514.19,1468.23 U4.1
  Top Layer w10: C11.1@1320,1605 1320,1595 1340,1575 1400,1575 1506.77,1468.23 U4.1@1514.19,1468.23
HPS: C11.2 R5.1 U4.20 | length 393.5
  Top Layer w10: R5.1 1323.31,1764.22 1323.31,1726.69 1350.65,1699.35 1390,1699.35 1409.35,1680 1409.35,1645.65 C11.2@1410,1645 ; C11.2@1430,1635 1465,1635 1570.53,1529.47 U4.20
IA_DIV_1: R4.1 R5.2 R10.1 | length 1252.2
  Top Layer w10: v1(1090,1680) 1246.92,1836.92 1403.08,1836.92 1425.8,1814.2 1425.8,1772.06 R5.2 1534.55,1770.45 1566.56,1738.44 1607.75,1738.44 R4.1 ; v1(1159.05,1219.6) 1198.65,1180 R10.1
  Bottom Layer w10: v1(1090,1680) 1090,1288.65 v1(1159.05,1219.6)
IA_DIV_2: C16.1 R11.2 R12.1 | length 1166
  Top Layer w10: R11.2@1379.07,2006.78 1607.97,2006.78 1617.64,1997.12 1652.43,1997.12 v1(1696.06,1953.49) ; v1(2073.66,1507.23) 2097.84,1483.05 C16.1
  Bottom Layer w10: v1(1696.06,1953.49) 1697.93,1951.61 1917.95,1951.61 2073.66,1795.91 v1(2073.66,1507.23)
IAOUT: R4.2 R11.1 U4.19 | length 729.8
  Top Layer w9: U4.19 R4.2@1590.21,1605.83
  Top Layer w10: R11.1@1379.07,1896.45 1433.69,1896.45 1515.24,1814.9 1684.02,1814.9 1709.06,1789.87 1709.06,1684.06 1654.06,1629.06 1613.82,1629.06 R4.2 1609.93,1625.55 R4.2@1590.21,1605.83
IN_REF: R3.2 R6.2 R23.2 R25.2 | length 623.1
  Top Layer w10: R6.2 895,1409.17 ; R25.2@850,1162.21 863.31,1148.9 996.69,1148.9 R23.2 ; 895,1410 900,1410 900.83,1409.17 ; v1(930,1380) 900.83,1409.17 ; v1(955,1210) 980.06,1184.94 980.06,1171.03 R23.2@991.09,1160 ; R3.2@1005,1440 935,1440 904.17,1409.17 900.83,1409.17
  Bottom Layer w10: v1(930,1380) 930,1235 v1(955,1210)
LCD_BRGTS: R22.1 U5.10 | length 1106.4
  Top Layer w10: R22.1@475,845 v1(520,845) ; v1(990,895) 990.86,895 1000.86,885 1415,885 1460,840 1460,784.92 1456.78,781.7 1456.78,781.43 1453.91,778.55 1453.91,766.65 U5.10
  Bottom Layer w10: v1(520,845) 560.92,885.92 891.77,885.92 892.69,885 977.29,885 987.29,895 v1(990,895)
LCD_CS: J1.3 U5.14 | length 1751.7
  Top Layer w10: J1.3@119.58,1770.34 259.49,1630.43 259.49,1521.43 915.92,865 1304.04,865 1374.26,794.78 U5.14
LCD_DC: J1.5 U5.29 | length 1819
  Top Layer w10: J1.5@119.58,1570.34 119.58,1563.86 819.82,863.62 v1(819.82,860.92) ; v1(1412.65,503.48) 1413.63,504.46 U5.29
  Bottom Layer w10: v1(819.82,860.92) 819.82,859.21 1175.55,503.48 v1(1412.65,503.48)
LCD_LED: C21.2 J1.8 R22.2 | length 573.9
  Top Layer w10: J1.8 200,1184.15 200,1010 230,980 278.97,980 295,963.97 295,880 330,845 R22.2
LCD_RST: J1.4 U5.15 | length 1658.7
  Top Layer w10: J1.4@119.58,1670.34 209.06,1580.87 209.06,1524.77 893.01,840.81 1307.01,840.81 1354.58,793.25 U5.15
LCD_SCK: J1.7 U5.7 | length 1810.4
  Top Layer w10: J1.7@119.58,1370.34 119.58,1369.54 568.55,920.57 v1(568.55,919.77) ; v1(950,920) 1010,920 1025,905 1470,905 1543.49,831.51 1543.49,786.16 v1(1543.07,785.75) ; U5.7 1497.22,721.53 1543.47,721.53 v1(1545,720)
  Bottom Layer w10: v1(568.55,919.77) 568.67,919.88 949.88,919.88 v1(950,920) ; v1(1543.07,785.75) 1544.04,784.78 1544.04,720.96 v1(1545,720)
LCD_SDI: J1.6 U5.13 | length 1632.7
  Top Layer w10: J1.6@119.58,1470.34 128.44,1461.49 131.4,1464.45 157.34,1464.45 824.67,797.13 v1(1268.19,797.13) ; v1(1378.28,830) 1378.28,827.29 1393.95,811.63 U5.13
  Bottom Layer w10: v1(1268.19,797.13) 1268.8,797.73 1268.8,811.87 1286.93,830 v1(1378.28,830)
LD+: J3.1 R6.1 R7.1 | length 1243.8
  Top Layer w20: J3.1 559.06,1930 659.06,1830 659.06,1521.85 685,1495.91 735,1495.91 ; R6.1@735,1420 735,1495.91 ; R7.1@1285.48,1485.39 1274.96,1495.91 1274.35,1495.91 735,1495.91
LD-: J3.2 R3.1 R8.1 | length 469.6
  Top Layer w20: J3.2 894.49,1700.51 1001.93,1593.07 R3.1@1001.93,1557.19 ; R3.1 1155.83,1550.07 R8.1
LODN: U4.11 U5.22 | length 1268.6
  Top Layer w9: 1688.27,1370.71 U4.11
  Top Layer w10: v1(1203.86,642.15) 1307.15,642.15 U5.22@1310,645 ; 1688.27,1370.71 1747.12,1311.86 v1(1749.25,1311.86)
  Bottom Layer w10: v1(1203.86,642.15) 1175,671 1175,870.36 1214.64,910 1449.64,910 1749.25,1209.6 v1(1749.25,1311.86)
LODP: U4.12 U5.21 | length 1656.2
  Top Layer w9: U4.12 1702,1409.17 1702.21,1408.96 1702.51,1408.96 1993.23,1118.23 1995,1116.47 1995,1065
  Top Layer w10: v1(1215,670) 1217.71,670 1222.71,665 U5.21@1310,665 ; v1(1505,930) 1506.51,931.51 1863.25,931.51 1995.87,1064.13
  Bottom Layer w10: v1(1215,670) 1196.3,688.7 1196.3,765.44 1200,769.14 1200,860 1225,885 1460,885 v1(1505,930)
NRST: C18.1 J2.2 U5.4 | length 1818.9
  Top Layer w10: U5.4 1608.68,663.38 1649.27,703.97 1649.27,713.27 v1(1648.91,713.63) ; v1(2251.87,713.27) 2336.84,713.27 C18.1 2342.13,711.72 2383.28,711.72 2438.09,656.91 2438.09,651.91 v1(2440,650) ; v1(3034.07,533.68) 3035.91,531.84 3206.14,531.84 J2.2
  Bottom Layer w10: v1(1648.91,713.63) 1649.27,713.27 v1(2251.87,713.27) ; v1@2440.18,649.82 2556.32,533.68 v1(3034.07,533.68)
Off: R17.1 U5.9 | length 1146.1
  Top Layer w10: U5.9 1551.7,765.75 1630.96,845 1797.96,845 1942.95,990 2100,990 2294.06,1184.06 2399.06,1184.06 2409.06,1194.06 R17.1
OPAMP+: C17.1 R12.2 U4.7 | length 1053.6
  Top Layer w9: 1590.21,1304.73 U4.7
  Top Layer w10: C17.1 v1(1509.06,1223.57) 1590.21,1304.73 ; v1(1509.05,1896.45) R12.2@1607.98,1896.45
  Bottom Layer w10: v1(1509.06,1223.57) 1456.62,1276.01 1456.62,1844.01 v1(1509.05,1896.45)
OPAMP-: R13.1 R14.1 U4.9 | length 456.4
  Top Layer w9: 1629.58,1315.31 U4.9
  Top Layer w10: 1629.58,1315.31 1688.68,1256.21 1688.68,1150.63 1707.33,1131.97 1749.25,1131.97 1830.14,1051.07 1858.69,1051.07 R13.1
OUT: C16.2 R13.2 R27.1 U4.10 | length 1230.3
  Top Layer w9: U4.10@1649.27,1340.94 U4.10 ; U4.10@1649.56,1340.65 1669.56,1340.65
  Top Layer w10: 1670,1340 1685,1340 1856.26,1168.74 1856.26,1154.6 1872.04,1138.81 R13.2 ; R13.2@1873.41,1146.69 1929.14,1146.69 v1(1947.75,1128.08) 1950,1128.08 1965.34,1112.73 1965.34,1100.34 1965,1100 ; v1(2134.44,1314.77) 2134.44,1358.97 2150.14,1374.67 C16.2 ; v1(2345,1000) R27.1@2410,1000
  Top Layer w20: R13.2@1865.53,1146.69 R13.2@1873.41,1146.69
  Bottom Layer w10: v1(1947.75,1128.08) 1969.32,1149.64 2134.44,1149.64 ; v1(2134.44,1314.77) 2134.44,1149.64 ; v1(2345,1000) 2346.79,1001.79 v1@2348.21,1001.79 ; v1@2347.5,1002.5 2200.36,1149.64 2134.44,1149.64
Q1_FDBK: D2.1 R16.1 R17.2 R18.2 | length 636.3
  Top Layer w10: R16.1@2330,1510 2335,1505 2415,1505 2424.59,1495.41 2487.2,1495.41 D2.1 2492.43,1452.43 2409.06,1369.06 R17.2 2572.93,1330.75 2599.07,1304.61 2639.17,1304.61 2653.89,1289.89 R18.2@2653.89,1280
Q1_G: Q2.1 R18.1 | length 444.9
  Top Layer w10: R18.1 2758.47,1282.61 2774.25,1298.39 2788.39,1298.39 2859.06,1369.06 2859.06,1595.94 2823.91,1631.09 2823.91,1655.12 Q2.1
Q2_G: D1.1 Q1.1 Q2.3 R15.1 | length 553.5
  Top Layer w10: D1.1 2641.05,1616.58 2641.05,1641.05 2695.8,1695.8 2730.99,1695.8 Q2.3 ; Q1.1 2687.24,1889.28 2687.24,1877.76 2727.69,1837.31 2727.69,1826.59 ; Q2.3@2727.69,1702.24 2727.69,1826.59 ; R15.1@2927.14,1826.27 2728.01,1826.27 2727.69,1826.59
REFIN: C10.2 R1.1 R2.2 U4.18 | length 709.4
  Top Layer w9: U4.18@1610.19,1507.52 1610.19,1567.38
  Top Layer w10: 1610.19,1567.38 1622.81,1580 1681.67,1580 1780,1678.33 1780,1725 1790.89,1735.89 R1.1@1827.66,1735.89 ; R1.1 R1.1@1827.66,1735.89 ; R2.2 R1.1@1837.98,1746.2 ; C10.2@1993.93,1735.89 1848.29,1735.89 R1.1@1837.98,1746.2 ; R1.1@1827.66,1735.89 R1.1@1837.98,1746.2
REFOUT: C13.2 C17.2 R14.2 R25.1 U4.8 | length 1293.3
  Top Layer w9: 1609.9,1279.9 U4.8
  Top Layer w10: R25.1@850,1057.79 850,1025 875,1000 1150,1000 1180,1030 C13.2@1230,1030 ; 1598.87,1034.88 1598.87,1268.87 1609.9,1279.9
  Top Layer w20: C13.2@1237.67,1023.07 1244.03,1016.72 1244.03,971.72 1255.74,960 1400,960 1461.83,1021.83 1493.55,1021.83 C17.2 1511.51,1034.88 1598.87,1034.88 1686.22,1034.88 R14.2@1688.68,1032.42
REnc1: J4.3 U5.28 | length 2356.9
  Top Layer w10: U5.28 1393.04,579.8 1393.04,559.22 1387.65,553.83 1387.65,491.13 1413.35,465.43 1534.9,465.43 1549.9,480.43 1757.04,480.43 2356.61,1080 3109.06,1080 3127.89,1098.84 3127.89,1230.21 J4.3
Renc2: J4.4 U5.30 | length 2297.7
  Top Layer w10: U5.30 1433.32,546.83 1481.49,498.66 1738.53,498.66 2338.71,1098.84 3026.59,1098.84 3068.63,1140.88 3068.63,1274.68 J4.4@3216.23,1422.28
RLD: C12.1 R9.2 U4.5 | length 742
  Top Layer w9: 1503.07,1389.49 U4.5@1518.36,1389.49
  Top Layer w10: C12.1@1377.11,1340.35 1453.93,1340.35 1503.07,1389.49
  Top Layer w20: R9.2@860.29,1268.79 1363.42,1268.79 1377.11,1282.48 C12.1@1377.11,1340.35
RLDFB: C12.2 U4.4 | length 301.1
  Top Layer w9: 1487.06,1409.17 U4.4
  Top Layer w10: C12.2 1286.71,1347.43 1286.71,1381.71 1305,1400 1477.89,1400 1487.06,1409.17
SDN: U4.13 U5.18 | length 1277.7
  Top Layer w9: U4.13 1724.93,1428.86
  Top Layer w10: v1(1221.3,704.93) 1281.59,704.93 1298.19,721.53 1310.37,721.53 U5.18 ; 1724.93,1428.86 v1(1813.87,1339.93)
  Bottom Layer w10: v1(1221.3,704.93) 1221.3,837.35 1238.95,855 1473.79,855 1779.25,1160.46 1779.25,1305.31 v1(1813.87,1339.93)
SP_POS: LS1.P R19.2 R20.1 | length 637.8
  Top Layer w10: LS1.P 1001.8,300 1009.65,292.15 1009.65,282.21 1169.7,282.21 1238.14,350.64 R19.2
Speaker: R19.1 U5.27 | length 179
  Top Layer w10: R19.1 1340.27,418.96 1340.27,527.66 1374.26,561.65 U5.27
SW: C13.1 R10.2 U4.6 | length 445.5
  Top Layer w9: U4.6@1570.53,1332.4 U4.6
  Top Layer w10: C13.1 1336.71,1091.71 1370,1125 R10.2@1370,1180 ; R10.2 1372.25,1187.92 1390.9,1206.58 1444.71,1206.58 U4.6@1570.53,1332.4
SWCLK: J2.3 U5.24 | length 2707.4
  Top Layer w10: v1(1164.74,448.18) 1164.74,501.62 1267.45,604.33 U5.24 ; v1(3077.9,630) J2.3
  Bottom Layer w10: v1(1164.74,448.18) 1164.74,430 1424.74,170 2797.56,170 3077.9,450.33 v1(3077.9,630)
SWDIO: J2.4 U5.23 | length 2942
  Top Layer w10: v1(1126.03,448.18) 1126.03,503.04 1247,624.01 U5.23
  Bottom Layer w10: v1(1126.03,448.18) 1126.03,395.34 1391.37,130 2820.67,130 3124.35,433.68 3124.35,704.35 3150,730 J2.4
V5V: C8.2 C9.1 Q1.3 U1.2 U2.2 U3.1 U3.6 | length 2788.2
  Top Layer w15: 2161.22,207.52 U3.1 ; 2184.25,319.73 U3.6 2233.04,388.04
  Top Layer w20: U1.2 2161.22,263.63 ; U2.2 2132.2,1926.5 2132.2,1892.8 2217.3,1807.7 C9.1 2387.7,1807.7 2445,1865 v1@2590,1865 ; 2161.22,207.52 2161.22,263.63 ; 2184.25,319.73 2161.22,296.7 2161.22,263.63 ; 2233.04,388.04 2640.73,795.73 2669.33,795.73 C8.2 2675.95,808.37 2658.31,826.01 v1(2658.31,880) ; v1(2590.32,1865.9) 2590.32,1880.32 2623.81,1913.81 2638.23,1913.81 Q1.3
  Bottom Layer w20: v1(2590.32,1865.9) 2591.84,1865.9 2658.31,1799.43 v1(2658.31,880)
VAD: C1.1 C4.2 R1.2 R23.1 R24.1 U2.1 U4.15 U4.17 | length 3453.9
  Top Layer w9: U4.17 U4.17@1629.58,1525.43
  Top Layer w10: R23.1@990,1055 1054.42,1055 1074.42,1075 v1(1075,1075) ; U4.17@1629.58,1525.43 1658.8,1554.65 1700.35,1554.65 1738.11,1516.89 1738.11,1510 ; U4.15 1723.23,1468.23 1738.11,1483.11 1738.11,1510 ; C4.2 1739.06,1509.06 1738.11,1510 ; C1.1@2005,1485 2050,1485 2065,1470 R24.1@2065,1275
  Top Layer w20: v1(1775,1625) R1.2@1820,1625 ; R1.2 1894.45,1625.55 1915,1605 1915,1495 1920,1490 C1.1@1990,1490 ; C4.2 1914.06,1509.06 ; 1917.93,1555.22 2129.29,1555.22 2141.01,1566.93 2141.01,1798.05 2055.58,1883.47 U2.1
  Bottom Layer w10: v1(1075,1075) 1075,1180 1034.53,1220.47 1034.53,1749.53 1230,1945 1610,1945 1775,1780 v1(1775,1625)
VBAT: C19.2 P1.2 Q1.2 R15.2 | length 714.5
  Top Layer w20: Q1.2 2924.47,1933.93 R15.2@2927.14,1936.6 ; R15.2 3009.65,1930.35 3081.68,1858.32 3081.68,1780.94 ; C19.2@2990,1715 3015.74,1715 3080.26,1779.53 ; 3085,1805 P1.2
VCC: C5.2 C6.2 C7.2 C20.1 J1.1 J4.5 U3.4 U5.1 U5.17 | length 6920.9
  Top Layer w10: C20.1@229.93,1965.07 C20.1@230,1965 ; v1(1253.77,740.73) 1254.47,741.43 1310.58,741.43 U5.17 ; U5.1 1531.02,604.33 1573.06,562.29 C6.2 ; J4.5 J4.5@3213.09,1514.82
  Top Layer w15: U3.4@2307.84,322.98 v1(2307.84,361.31)
  Top Layer w20: 39.06,1294.9 39.06,1924.06 77.15,1962.15 111.39,1962.15 J1.1@111.93,1962.69 ; 40,1290 40,645 90,595 260,595 325.01,660.01 ; J1.1 C20.1@229.93,1965.07 ; 327.79,662.79 405,740 420,740 420.73,740.73 v1(1253.77,740.73) ; C6.2 1661.1,562.29 v1(1669.56,553.83) ; v1(2144.45,361.31) C7.2@2144.45,430 ; U3.4@2310.49,325.63 C5.2 3206.08,325.63 3277.37,396.92 3277.37,1492.63 3255.18,1514.82 J4.5@3213.09,1514.82
  Bottom Layer w20: J1.1@111.93,1962.69 J1.1@119.58,1970.34 ; v1(1253.77,740.73) 1255.36,739.15 1255.36,565.55 1267.07,553.83 1485.39,553.83 1495,544.22 1584.29,544.22 1593.9,553.83 v1(1669.56,553.83) 1669.56,362.13 1824.16,207.52 2091.98,207.52 2144.45,260 v1(2144.45,361.31) v1(2307.84,361.31)
VDDA: C2.2 C3.2 U1.1 U5.5 | length 913.7
  Top Layer w10: U5.5 1593.01,683.07 v1(1602.81,692.88)
  Top Layer w20: C3.2@1737.8,230 1730.2,237.59 C2.2 1735.62,349.98 v1(1779.25,349.98) 1865.6,263.63 U1.1
  Bottom Layer w20: v1(1602.81,692.88) 1779.25,516.44 v1(1779.25,349.98)
XT1_1: C15.1 U5.2 X1.2 | length 501.5
  Top Layer w10: U5.2 1726.53,624.01 1738.95,636.44 X1.2@1764.99,636.44 ; X1.2 1802.35,650.9 1824.16,650.9 1935.3,762.04 1935.3,789.69 C15.1
XT1_2: C14.1 U5.3 X1.1 | length 397.3
  Top Layer w10: U5.3 1614.33,643.7 1700.87,730.24 ; C14.1 1687.17,789.89 1700.87,776.19 1700.87,730.24 ; X1.1 1780.8,727.78 1703.34,727.78 1700.87,730.24
pads on no net: J1.9 J1.10 J1.11 J1.12 J1.13 J1.14 J1.15 J1.16 J1.17 J1.18 J3.4 U3.3 U3.5 U5.8 U5.12 U5.19 U5.20 U5.25 U5.26
copper on no net: | length 2.3
  Top Layer w10: 1332.61,580.71 1334.89,580.71

## Polygon pours and split planes (outlines as drawn)
GND on Bottom Layer "GND_L02_P000" (solid, pour order 0): 0,2130 3309.06,2130 3309.06,2.05 0,2.05
GND on Top Layer "GND_L01_P001" (solid, pour order 1): 0,2130 3309.06,2130 3309.06,2.05 3309.05,2.05 0,2.05 0,2130

## Other copper
Top Layer:
  rectangle: 9.06,2130 3309.06,2130

## Silkscreen, mask and mechanical layers (free items; w line width, h text height)
Top Overlay:
  text "LEADS" at 825,2025 h40
  text "AC" at 2130,1185 h40
  text "CONTROL" at 3140,1185 h40 r90
  text "DC" at 2200,1100 h40
  text "AC" at 830,985 h40
  text "DC" at 975,980 h40
  text "FE_O" at 2980,906.66 h40
  text "BOOT" at 2985,810 h40
  text "SWDIO" at 2950,705 h40
  text "SWDCLK" at 2905,605 h40
  text "ILI9341" at 45,525 h40
  text "NRST" at 2985,505 h40
  text "GND" at 3025,410 h40
  text "ECG Register 1.1" at 1995,54.99 h60
Board:
  the board outline again, w10

## Text inside footprints (layer, text, board x,y; h text height)
J1: Top Overlay "J1A" at 70,2040 h40; Top Overlay "J1B" at 2945,1055 h40
LS1: Top Overlay "+" at 881.54,322.5 h40 r180; Top Overlay "-" at 301.99,306.41 h40 r180